# EAGLE board power supply brd (EAGLE 9.7.0)
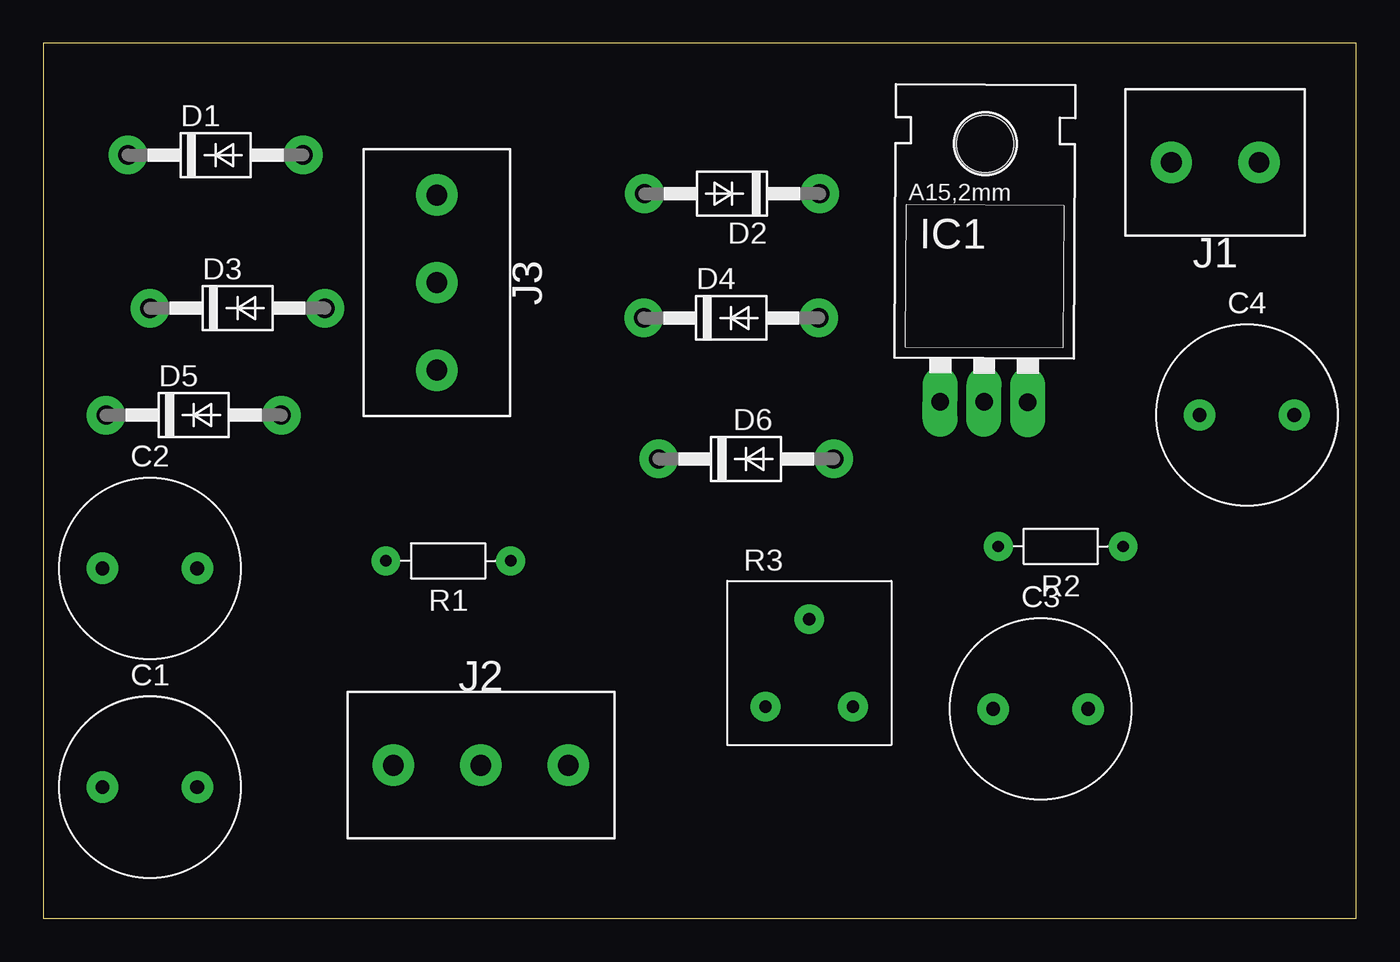
[diagram p0: board, top side]
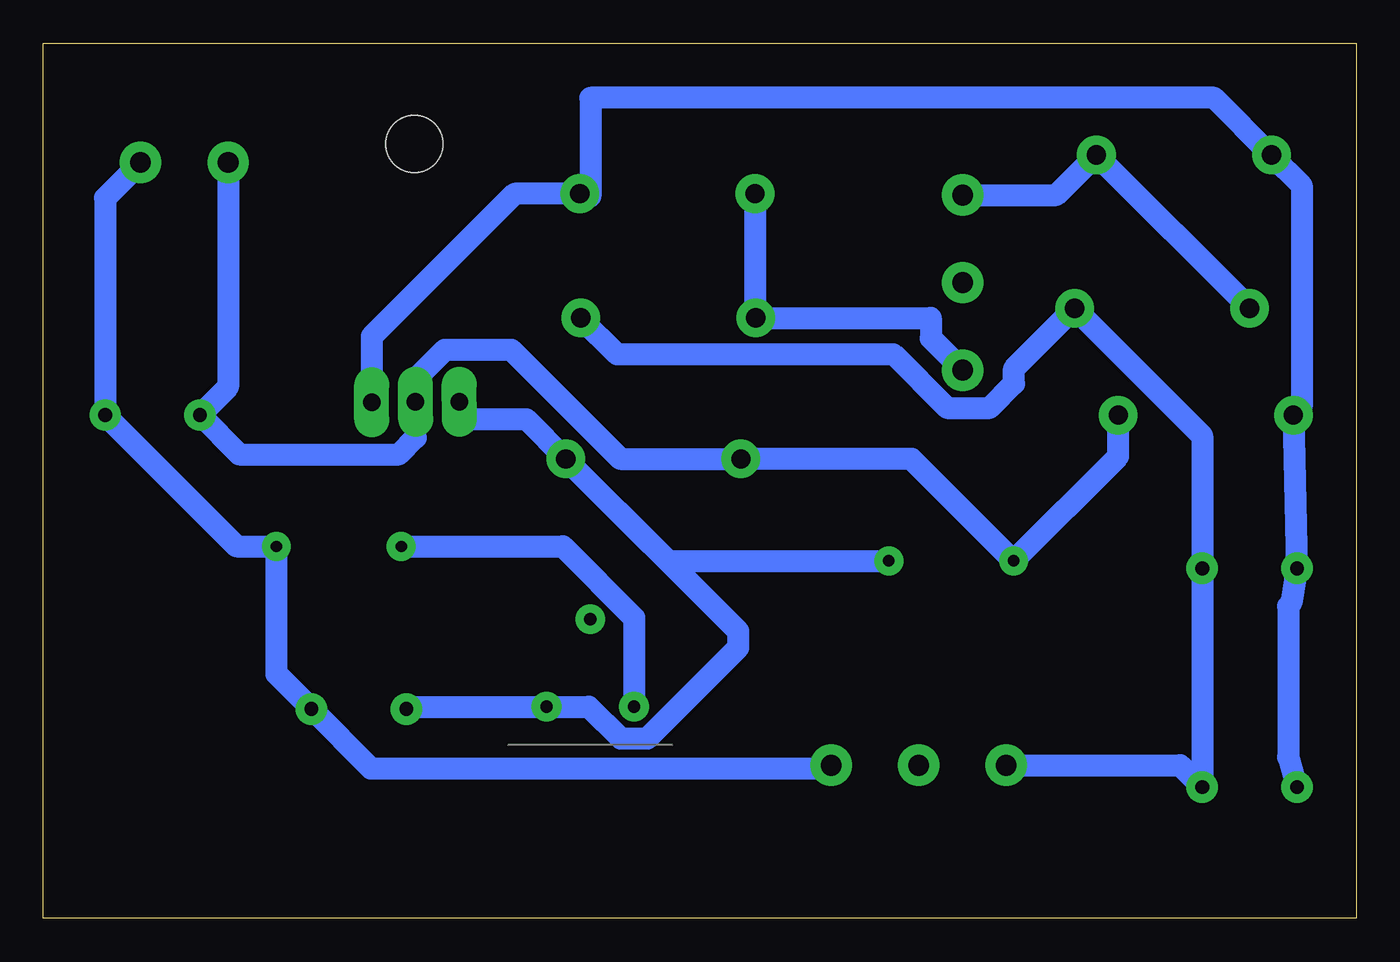
[diagram p1: board, bottom side, seen from below]

Size 76.2 x 50.8 mm. Coordinates in mm from the lower left corner, seen from the top.
Outline: 0,0 76.2,0 76.2,50.8 0,50.8 0,0
Copper layers (1*16): Top 0.035mm / dielectric 1.5mm / Bottom 0.035mm
Design rules "Fusion Electronics Design Rules": minimum track width 30mil, minimum drill 0.5024mm, track to track 18mil, track to pad 14mil, pad to pad 14mil, via to via 18mil, smd to smd 6mil, copper to edge 100mil, drill to drill 6mil, minimum pad ring 20mil, minimum via ring 8mil, stop-mask expansion 4mil, vias tented up to drill 0mil, thermal gap 20mil

## Footprints (pad centres in the part's own frame; a part is rotated, then mirrored left to right if it is on the bottom)
CAPRD550W60D1025H1250B = drill 0.8 pad 1.4: 1 -2.75,0; 2 2.75,0
DO41-10 = drill 1.118: A 5.08,0; C -5.08,0
317TL = drill 1.016 long: 1 -2.54,-3.81; 2 0,-3.81; 3 2.54,-3.81 | hole 3.302: 0,11.176
TERMBLK_508-2N = drill 1.2: 1 0,0; 2 5.08,0
TERMBLK_508-3N = drill 1.2: 1 0,0; 2 5.08,0; 3 10.16,0
RESAD724W46L381D178B = drill 0.66 pad 1.26: 1 -3.62,0; 2 3.62,0
3310Y-001-104L-ND = drill 0.71: 1 -2.54,-2.54; 2 0,2.54; 3 2.54,-2.54

## Placement (x,y rotation side)
C1  470 uF  [CAPRD550W60D1025H1250B]  6.2,7.62 0 top
C2  1uF  [CAPRD550W60D1025H1250B]  6.2,20.32 0 top
C3  10 uF  [CAPRD550W60D1025H1250B]  57.88,12.16 0 top
C4  1000 uF  [CAPRD550W60D1025H1250B]  69.85,29.21 0 top
D1  1N4004  [DO41-10]  10.01,44.3 0 top
D2  1N4004  [DO41-10]  39.98,42.06 180 top
D3  1N4004  [DO41-10]  11.28,35.41 0 top
D4  1N4004  [DO41-10]  39.93,34.85 0 top
D5  1N4004  [DO41-10]  8.74,29.21 0 top
D6  1N4004  [DO41-10]  40.79,26.67 0 top
IC1  LM317  [317TL]  54.61,33.78 359.7 top
J1  TERM-BLK-2P  [TERMBLK_508-2N]  65.46,43.87 0 top
J2  TERM-BLK-3P  [TERMBLK_508-3N]  30.48,8.89 180 top
J3  TERM-BLK-3P  [TERMBLK_508-3N]  22.84,31.82 90 top
R1  1 kohm  [RESAD724W46L381D178B]  23.51,20.75 180 top
R2  560 ohm  [RESAD724W46L381D178B]  59.04,21.59 180 top
R3  3310Y-001-104L  [3310Y-001-104L-ND]  44.45,14.83 0 top

## Library data of the parts
C1-C4 = Capacitor; CATEGORY: Capacitor
D1-D6 = diode
IC1 = v-reg
J1 = Connector; CATEGORY: Fixed Terminal Blocks; DESCRIPTION: Fixed Terminal Blocks 5.08MM PCB MOUNT 2P; MANUFACTURER: TE Connectivity AMP Connectors; MPN: 282837-2; OPERATING_TEMPERATURE: -40°C to +105°C; PART_STATUS: ACTIVE; PITCH: 0.200" (5.08mm); ROHS_COMPLIANCE: RoHS Compliant; SERIES: Buchanan; SUBCATEGORY: Terminal Blocks; TYPE: Through Hole; Screw - Rising Cage Clamp; Side wire entry, Horizontal with Board
J2 J3 = Connector; CATEGORY: Connector; DESCRIPTION: TERM BLK 3P SIDE ENT 5.08mm PCB; MANUFACTURER: TE Connectivity; MPN: 282837-3; OPERATING_TEMPERATURE: -40°C to +105°C; PART_STATUS: Active; PITCH: 0.200" (5.08mm); ROHS_COMPLIANCE: RoHS Compliant; SERIES: Buchanan; SUBCATEGORY: Terminal Block; TYPE: Side Wire Entry
R1 R2 = Resistor; CATEGORY: Resistor; SUB-CATEGORY: Fixed
R3 = Potentiometer_Trimmers; CREATED_BY: PCBLayout.com; DIGIKEY_PARTNO: 3310Y-001-104L-ND; MANUFACTURER: Bourns Inc.; MPN: 3310Y-001-104L

## Nets
N$1: D1.A D3.C J3.3
N$2: C1.1 C2.1 D1.C D2.C D5.C IC1.3
N$3: C1.2 C2.2 D3.A D4.A J2.3
N$4: D2.A D4.C J3.1
N$5: C3.2 C4.2 J1.2 J2.1 R2.1
N$6: R2.2 R3.1
N$7: C4.1 D5.A D6.C IC1.2 J1.1 R1.2
N$8: C3.1 D6.A IC1.1 R1.1 R3.3

## Tracks (layer width: path | path; a pad name or v marks a point on that pad's centre or on a via)
N$1
  Bottom 1.27: J3.3 17.41,41.98 D1.A D3.C
N$2
  Bottom 1.27: IC1.3 57.13,30.98 57.13,33.77 48.84,42.06 D2.C 44.9,41.91 44.45,41.91 44.45,47.62 8.25,47.62 D1.C 3.17,42.55 3.17,29.69 D5.C C2.1 3.79,18.31 3.96,18.14 3.96,9.37 C1.1 | IC1.3
N$3
  Bottom 1.27: D4.A 42.9,32.74 26.86,32.74 23.75,29.63 21.27,29.63 19.86,31.04 19.86,31.91 D3.A 8.95,28 C2.2 C1.2 10.22,8.89 J2.3
N$4
  Bottom 1.27: D2.A 34.9,34.9 D4.C 24.69,34.85 24.69,33.67 J3.1
N$5
  Bottom 1.27: J1.2 72.6,41.82 C4.2 64.98,21.59 R2.1 62.66,14.19 C3.2 57.18,8.71 30.66,8.71 J2.1
N$6
  Bottom 1.27: R2.2 46.05,21.59 41.91,17.45 R3.1
N$7
  Bottom 1.27: D5.A 13.82,26.82 R1.2 25.81,26.67 D6.C 42.7,26.67 49.04,33.01 52.89,33.01 54.59,31.3 54.59,30.99 IC1.2 | IC1.2 54.59,28.96 54.59,27.91 55.55,26.94 64.83,26.94 C4.1 65.46,30.85 J1.1 | IC1.2 | IC1.2
N$8
  Bottom 1.27: D6.A 39.95,20.75 R1.1 | C3.1 54.99,12.29 R3.3 44.53,12.29 42.68,10.44 41.14,10.44 35.86,15.72 35.86,16.66 D6.A | IC1.1 52.05,28.97 48.17,28.97 D6.A | IC1.1